# Altium PCB PE2.PcbDoc
Units mm, origin at the board's own origin, x right, y up, seen from the top; angles counter-clockwise.
Board outline 87.72 x 35 mm, 2 copper layers (Top Layer, Bottom Layer); 76 components, 57 nets, 284 pads, 403 vias.
Unrouted connection lines stored in the file: 1.
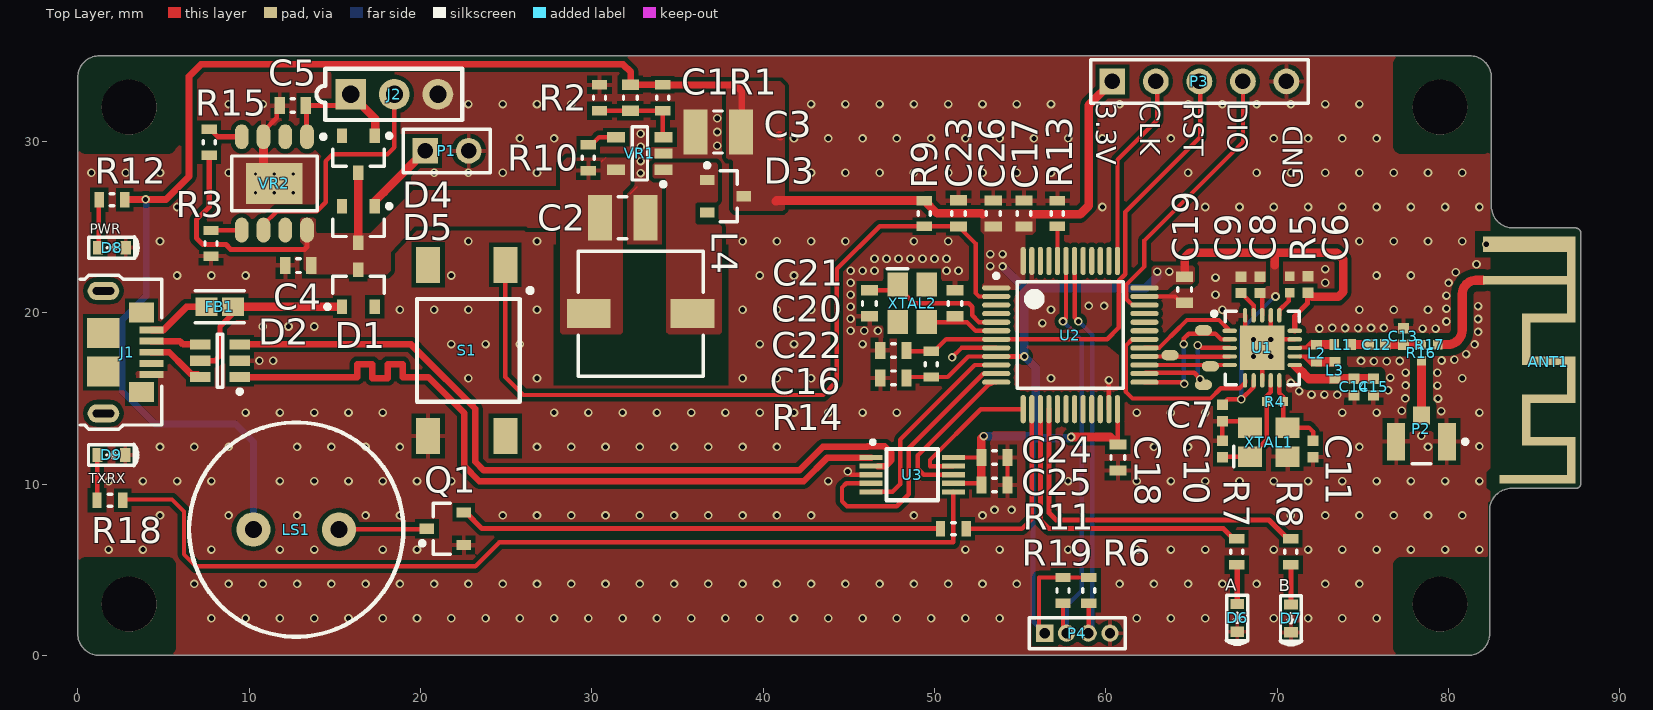
[diagram p0: Top Layer view]
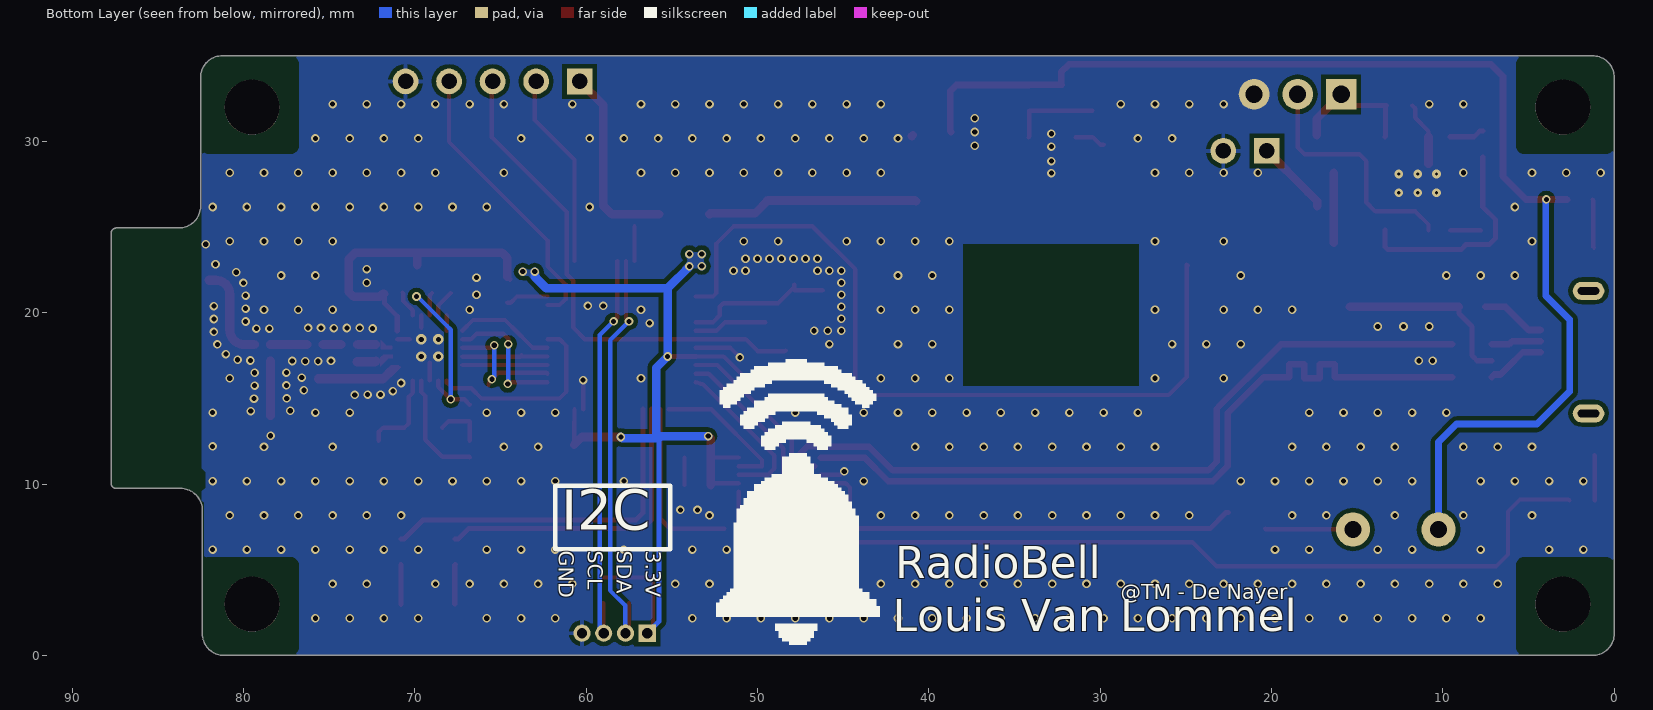
[diagram p1: Bottom Layer view, seen from below]

## Layer stack, top to bottom
Top Solder: solder mask 0.0102, Solder Resist, Dk 3.5
Top Layer: signal copper 0.0356
Dielectric 1: dielectric 0.32, FR-4, Dk 4.8
Bottom Layer: signal copper 0.0356
Bottom Solder: solder mask 0.0102, Solder Resist, Dk 3.5

## Board outline
1.27,0 cw(c1.27,1.27) 0,1.27 0,33.73 cw(c1.27,33.73) 1.27,35 81.23,35 cw(c81.23,33.73) 82.5,33.73 82.5,26.219 ccw(c83.77,26.219) 83.77,24.949 87.412,24.949 cw(c87.412,24.642) 87.719,24.642 87.719,10.039 cw(c87.43,10.039) 87.43,9.75 83.67,9.75 ccw(c83.67,8.48) 82.4,8.48 82.4,1.27 cw(c81.13,1.27) 81.13,0

## Design rules (kind name [scope] priority, off if disabled: settings)
Clearance Clearance_RF [InNetClass('RF') vs InNetClass('RF')] p1: gap=0.254 ignorepadtopadclearanceinfootprint=TRUE except(0: Arc-Hole Track-Hole SMDPad-Hole THPad-Hole Via-Hole Fill-Hole Poly-Hole Region-Hole Text-Hole; 0.1: Arc-SMDPad Track-SMDPad; 0.2: Arc-Arc Arc-Track Track-Track; 0.5: Arc-Fill Arc-Poly Track-Fill Track-Poly SMDPad-Poly)
Clearance [All] p2: gap=0.254 ignorepadtopadclearanceinfootprint=TRUE except(0: Arc-Hole Track-Hole SMDPad-Hole THPad-Hole Via-Hole Fill-Hole Poly-Hole Region-Hole Text-Hole; 0.1: Arc-SMDPad Track-SMDPad; 0.2: Arc-Arc Arc-Track Track-Track)
DiffPairsRouting [All] p1: maxlimit=0.254 minlimit=0.254 mostfreqgap=0.254 toplayer_minwidth=0.381 toplayer_maxwidth=0.381 toplayer_prefwidth=0.381 bottomlayer_minwidth=0.381 bottomlayer_maxwidth=0.381 bottomlayer_prefwidth=0.381 maxuncoupledlength=12.7
PlaneConnect [All] p1: pad.planeconnectstyle=Relief pad.reliefexpansion=0.508 pad.reliefentries=4 pad.reliefconductorwidth=0.254 pad.reliefairgap=0.254 via.planeconnectstyle=Direct via.reliefexpansion=0.508 via.reliefentries=4 via.reliefconductorwidth=0.254 via.reliefairgap=0.254
PolygonConnect [All] p1: thpad.connectstyle=Relief thpad.reliefconductorwidth=0.254 thpad.reliefentries=4 thpad.polygonreliefangle="90 Angle" thpad.airgapwidth=0.254 smdpad.connectstyle=Relief smdpad.reliefconductorwidth=0.254 smdpad.reliefentries=4 smdpad.polygonreliefangle="90 Angle" smdpad.airgapwidth=0.254 via.connectstyle=Direct via.reliefconductorwidth=0.254 via.reliefentries=4 via.polygonreliefangle="90 Angle" via.airgapwidth=0.254
RoutingVias [All] p1: holewidth=0.711 width=1.27 viastyle="Through Hole" minholewidth=0.711 minwidth=1.27 maxholewidth=0.711 maxwidth=1.27
SolderMaskExpansion [All] p1: expansion=0.102 istentingtop=FALSE
Width RF [InNetClass('RF')] p1: maxlimit=0.535 minlimit=0.535 preferedwidth=0.535 impedanceprofiledriven=TRUE impedanceprofileid={F3C3EB3E-1D35-4288-9E20-0115B76D9D70} impedanceprofilevalue=50.000000 minimp=50.000000 maximp=50.000000 favimp=50.000000 // RF Impedance
Width [All] p2: maxlimit=0.535 minlimit=0.254 preferedwidth=0.254 bottomlayer_maxwidth=0.5 minimp=50.000000 maximp=50.000000 favimp=50.000000
28 further rules are at their usual default settings.

## Classes and differential pairs
net class RF: ANT1 ANT2 NetANT1_1 NetC12_1 NetC12_2 NetP2_3 VDD_PA
component class U_RF: ANT1 C6 C7 C8 C9 C10 C11 C12 C13 C14 C15 L1 L2 L3 P2 R4 R5 R16 R17 U1 XTAL1
component class U_POWER: C1 C2 C3 C4 C5 C24 C25 D1 D2 D3 D4 D5 D8 D9 FB1 J1 J2 L4 P1 R1 R2 R3 R10 R12 R15 R18 U3 VR1 VR2
component class U_MCU: C16 C17 C18 C19 C20 C21 C22 C23 C26 D6 D7 LS1 P3 P4 Q1 R6 R7 R8 R9 R11 R13 R14 R19 S1 U2 XTAL2
differential pair USBD: +USBD_P -USBD_N
differential pair USB: +USB_P -USB_N

## Components (designator, comment, footprint, x,y, rotation, side; value= is the part's Value field where it differs from the comment)
ANT1 "PCB Antenna 2.4Ghz 50ohm" "2.4GHZ ANTENNA" 85.82,17.145 r270 top locked
C1 "Cf = 1 / (2 × π X R1 × fz)" CAP_0603 32.25,32.55 r270 top value=4.7nF
C2 "" CAP_1210 31.8,25.55 r0 top value=2.2uF
C3 "" CAP_1210 37.375,30.55 r180 top value=4.7uF
C4 "" CAP_0603 12.875,22.75 r0 top value=1uF
C5 "" CAP_0603 12.55,32.1 r0 top value=1uF
C6 "0402" CAP_0402 71.795,21.645 r270 top value=10nF
C7 "0402" CAP_0402 66.8,14.15 r90 top value=10nF
C8 "0402" CAP_0402 69,21.63 r270 top value=10nF
C9 "0402" CAP_0402 67.9,21.63 r270 top value=33nF
C10 "0402" CAP_0402 66.8,12.05 r270 top value=30pF
C11 "0402" CAP_0402 72.1,12.05 r90 top value=30pF
C12 "0402" CAP_0402 75.82,18.145 r180 top value=1.5pF
C13 "0402" CAP_0402 77.37,18.62 r90 top value=1pF
C14 "0402" CAP_0402 74.495,15.67 r270 top value=2.2nF
C15 "0402" CAP_0402 75.62,15.674 r270 top value=4.7pF
C16 "" CAP_0603 47.6,16.2 r0 top value=4.7uF
C17 "" CAP_0603 55.225,25.798 r270 top value=100nF
C18 "" CAP_0603 60.7,11.55 r90 top value=100nF
C19 "" CAP_0603 64.6,21.35 r90 top value=100nF
C20 "" CAP_0603 46.2,20.55 r90 top value=15pF
C21 "" CAP_0603 51.2,20.55 r270 top value=15pF
C22 "" CAP_0603 47.6,17.8 r0 top value=100nF
C23 "" CAP_0603 51.4,25.8 r270 top value=100nF
C24 "" CAP_0603 53.5,11.55 r0 top value=0.1uF
C25 "" CAP_0603 53.5,9.95 r0 top value=0.1uF
C26 "" CAP_0603 53.425,25.798 r270 top value=100nF
D1 "" SOT-23_L 16.375,21.425 r90 top
D2 "USBLC6-2SC6" STM-SOT23-6L_V 8.3,17.2 r180 top
D3 "" SOT-23_L 37.8,26.8 r0 top
D4 "" SOT-23_L 16.375,29.25 r270 top
D5 "" SOT-23_L 16.375,25.15 r270 top
D6 "LED" LED_0603 67.665,2.181 r270 top
D7 "LED" LED_0603 70.8,2.15 r270 top
D8 "LED" LED_0603 2,23.8 r0 top
D9 "LED" LED_0603 1.975,11.7 r0 top
FB1 "BLM18PG121SN1D" FP-BLM18-0_15-t0_8-IPC_A 8.287,20.35 r0 top
J1 "USB B micro" "USB Micro B" 2.9,17.7 r270 top
J2 "3 pin header" Header_3 15.935,32.75 r270 top
L1 "0402" IND_0402 73.82,18.145 r0 top value=3.9nH
L2 "0402" IND_0402 72.295,17.645 r90 top value=8.2nH
L3 "0402" IND_0402 73.37,16.645 r270 top value=2.7nH
L4 "" INDP7373X45N 32.85,19.95 r0 top value=10uH
LS1 "Buzzer" Buzzer 12.75,7.35 r0 top
P1 "Solar" HDR1X2 20.275,29.45 r0 top
P2 "" HRS-U.FL-R-SMT-3_V 78.421,12.48 r180 top
P3 "Header 5" HDR1X5 60.38,33.5 r0 top
P4 "MHDR1X4" MHDR1X4 56.433,1.3 r0 top
Q1 "NPN" SOT23_L 21.452,7.396 r180 top
R1 "R1 = R2 × (VOUT/1.23 − 1)" RES_0603 34.15,32.55 r270 top value=5k6
R2 "" RES_0603 30.45,32.55 r90 top value=3k3
R3 "" RES_0603 7.775,24.05 r90 top value=33k
R4 "" RES_0402 69.87,14.82 r0 top value=1M
R5 "0402" RES_0402 70.72,21.645 r90 top value=22k
R6 "" RES_0603 59,3.8 r90 top value=2k2
R7 "" RES_0603 67.643,6.055 r90 top value=1k
R8 "" RES_0603 70.798,6.055 r90 top value=1k
R9 "" RES_0603 49.4,25.8 r270 top value=3.3k
R10 "" RES_0603 29.8,29.05 r90 top value=4.7K
R11 "" RES_0603 51.1,7.4 r180 top value=1k
R12 "" RES_0603 2,26.6 r0 top value=1k
R13 "" RES_0603 57.175,25.798 r90 top value=1k
R14 "" RES_0603 49.8,17 r90 top value=1k
R15 "" RES_0603 7.675,29.95 r90 top value=10k
R16 "0402" RES_0402 78.42,17.67 r90 top value=0R
R17 "0402" RES_0402 78.895,18.145 r0 top value=0R
R18 "" RES_0603 1.875,9.05 r0 top value=1k
R19 "" RES_0603 57.5,3.8 r90 top value=2k2
S1 "" TactileSwitch6x6 22.7,17.8 r270 top
U1 "nRF24L01P" "QFN20 4X4" 69.125,17.95 r0 top
U2 "STM32F301C8T6TR" STM-LQFP48_M 57.927,18.7 r0 top
U3 "CH340E" MSOP-10 48.7,10.55 r0 top
VR1 "LM2731YMF" SOT23-5 32.8,29.3 r180 top
VR2 "Battery charger" SOP127P600-8N 11.475,27.55 r270 top
XTAL1 "16Mhz" 16Mhz_Crystal 69.5,12.45 r0 top
XTAL2 "32Mhz" 16Mhz_Crystal 48.7,20.55 r270 top

## Footprints (in the part's own frame and the unit in brackets; to place one, negate y for a bottom-side part, rotate by r counter-clockwise, add the part's x,y. Pads: shape width x height; smd on the part's side, far side on the other; paste and mask are expansions set on the pad)
"2.4GHZ ANTENNA" [mm] "PCB Antenna 2.4Ghz, TI AN043"
  rect 5x0.5 smd mask+0.102: 1(-4.8,1.35)
  rect 0.5x4.9 smd mask+0.102: 1(-4.75,-1.35)
  rect 0.5x2.64 smd mask+0.102: 1(-2.55,-0.22) 1(-0.05,-0.22) 1(2.15,-0.22) 1(4.65,-0.22)
  rect 2x0.5 smd mask+0.102: 1(-1.3,-1.29) 1(3.4,-1.29)
  rect 2.7x0.5 smd mask+0.102: 1(1.05,1.35) 1(5.75,1.35)
  rect 0.5x3.94 smd mask+0.102: 1(6.85,-0.87)
  rect 0.9x4.9 smd mask+0.102: 2(-6.85,-1.35)
16Mhz_Crystal [mm] "16Mhz crystal"
  rect 1.4x1.2 smd: 1(-1.1,-0.85) 3(1.1,0.85) GND(-1.1,0.85) GND(1.1,-0.85)
  silkscreen extent -2.02,-1.45 -2.02,-0.25, body extent -1.6,-1.25 1.6,1.25, height 0.6
Buzzer [mm]
  round 2 hole 1: 1(-2.5,0) 2(2.5,0)
  silkscreen extent -6.25,-6.25 6.25,6.25, body extent -6,-5.99 6,5.99, height 7.5
CAP_0402 [mm] "Chip Capacitor, 2-Leads, Body 1,00x0,50mm, IPC Medium Density"
  rect 0.6x0.64 smd: 1(-0.48,0) 2(0.48,0)
  body extent -0.5,-0.25 0.5,0.25, height 0.35
CAP_0603 [mm] "Chip Capacitor, 2-Leads, Body 1,55x0,85mm, IPC Medium Density"
  rect 0.6x1 smd: 1(-0.76,0) 2(0.76,0)
  silkscreen extent -0.1,-0.4 0.1,0.4, body extent -0.78,-0.43 0.77,0.42, height 0.45
CAP_1210 [mm]
  rect 1.4x2.65 smd: 1(-1.325,0) 2(1.325,0)
  silkscreen extent -0.25,-1.22 0.25,1.23, body extent -1.6,-1.25 1.6,1.25, height 0.55
FP-BLM18-0_15-t0_8-IPC_A [mm]
  rect 1.306x1.058 smd paste+0 mask+0: 1(-0.776,0) 2(0.776,0)
  silkscreen extent -1.43,-0.93 1.43,0.93, body extent -1.93,-1.03 1.93,1.03, height 0.25
HDR1X2 [mm] "Connector; Header; 2 Position"
  rect 1.5x1.5 hole 0.9: 1(0,0)
  round 1.5 hole 0.9: 2(2.54,0)
  silkscreen extent -1.27,-1.27 3.81,1.27
HDR1X5 [mm] "Connector; Header; 5 Position"
  rect 1.5x1.5 hole 0.9: 1(0,0)
  round 1.5 hole 0.9: 2(2.54,0) 3(5.08,0) 4(7.62,0) 5(10.16,0)
  silkscreen extent -1.27,-1.27 11.43,1.27
Header_3 [mm]
  rect 1.8x1.8 hole 1: 1(0,0)
  round 1.8 hole 1: 2(0,2.54) 3(0,5.08)
  silkscreen extent -1.5,-2 1.5,6.5
HRS-U.FL-R-SMT-3_V [mm] "SMT, 3-Leads, Body 2.6x2.6mm"
  rect 1.05x2.2 smd: 1(-1.475,0) 2(1.475,0)
  rect 1x1.05 smd: 3(0,-1.525)
  silkscreen extent -2.68,-0.12 0.55,1.3, body extent -1.3,-1.3 1.3,1.3, height 1.25
IND_0402 [mm] "Chip Inductor, 2-Leads, Body 1,00x0,50mm, IPC Medium Density"
  rect 0.57x0.64 smd: 1(-0.495,0) 2(0.495,0)
  body extent -0.5,-0.25 0.5,0.25, height 0.35
INDP7373X45N [mm] "Precision Wire Wound Inductor, 2-Leads, Body 7,30x7,30mm, IPC Medium Density"
  rect 2.55x1.7 smd: 1(-3.025,0) 2(3.025,0)
  silkscreen extent -3.65,-3.65 3.65,3.65, body extent -3.75,-3.65 3.75,3.65, height 4.6
LED_0603 [mm]
  rect 0.6x0.8 smd: 1(-0.819,0) 2(0.8,0)
  silkscreen extent -1.35,-0.61 1.5,0.61, body extent -0.83,-0.35 0.83,0.37, height 0.68
MHDR1X4 [mm] "Connector; Header; 4 Position"
  rect 1x1 hole 0.6: 1(0,0)
  round 1 hole 0.6: 2(1.27,0) 3(2.54,0) 4(3.81,0)
  silkscreen extent -0.9,-0.9 4.71,0.9
MSOP-10 [mm] "USB to serial"
  rect 1.35x0.3 smd: 1(-2.4,1) 2(-2.4,0.5) 3(-2.4,0) 4(-2.4,-0.5) 5(-2.4,-1) 6(2.4,-1) 7(2.4,-0.5) 8(2.4,0) 9(2.4,0.5) 10(2.4,1)
  silkscreen extent -2.4,-1.5 1.5,2, body extent -2.45,-1.5 2.45,1.5, height 1.15
"QFN20 4X4" [mm] "QFN, 20-Leads, Body 4,00x4,00mm, Pitch 0,50mm, Thermal Pad 2,60x2,60mm, IPC Medium Density"
  oval 0.85x0.25 smd: 1(-1.9,1) 2(-1.9,0.5) 3(-1.9,0) 4(-1.9,-0.5) 5(-1.9,-1) 11(1.9,-1) 12(1.9,-0.5) 13(1.9,0) 14(1.9,0.5) 15(1.9,1)
  oval 0.25x0.85 smd: 6(-1,-1.9) 7(-0.5,-1.9) 8(0,-1.9) 9(0.5,-1.9) 10(1,-1.9) 16(1,1.9) 17(0.5,1.9) 18(0,1.9) 19(-0.5,1.9) 20(-1,1.9)
  rect 2.6x2.6 smd: 21(0,0)
  silkscreen extent -2.92,-2.15 2.15,2.15, body extent -2.02,-2.02 2.02,2.02, height 0.95
RES_0402 [mm] "Chip Resistor, 2-Leads, Body 1,00x0,50mm, IPC Medium Density"
  rect 0.55x0.55 smd: 1(-0.475,0) 2(0.475,0)
  body extent -0.5,-0.25 0.5,0.25, height 0.35
RES_0603 [mm] "Chip Resistor, 2-Leads, Body 1,55x0,85mm, IPC Medium Density"
  rect 0.55x0.9 smd: 1(-0.75,0) 2(0.75,0)
  silkscreen extent -0.1,-0.35 0.1,0.35, body extent -0.78,-0.43 0.77,0.42, height 0.45
SOP127P600-8N [mm]
  oval 1.45x0.8 smd: 1(-2.725,1.905) 2(-2.725,0.635) 3(-2.725,-0.635) 4(-2.725,-1.905) 5(2.725,-1.905) 6(2.725,-0.635) 7(2.725,0.635) 8(2.725,1.905)
  rect 2.4x3.3 smd: 9(0,0)
  silkscreen extent -2.85,-2.5 1.6,2.98, body extent -2,-2.5 2,2.5, height 1.45
SOT23-5 [mm] "SOT23, 5-Leads, Body 3,00x2,85mm, Pitch 0,95mm, IPC Medium Density"
  rect 1.05x0.6 smd: 1(-1.375,0.95) 2(-1.375,0) 3(-1.375,-0.95) 4(1.375,-0.95) 5(1.375,0.95)
  silkscreen extent -1.5,-1.55 0.45,1.92, body extent -1.5,-1.55 1.5,1.55, height 1.3
SOT23_L [mm] "SOT23, 3-Leads, Body 2.9x1.3mm, Pitch 0.95mm, Lead Span 2.3mm - Reverse Pinning, IPC High Density"
  rect 0.85x0.6 smd: 1(1.075,0) 2(-1.075,-0.95) 3(-1.075,0.95)
  silkscreen extent -0.3,-1.5 1.47,1.5, body extent -0.7,-1.5 0.7,1.5, height 1.1
SOT-23_L [mm] "SOT23, 3-Leads, Body 2.9x1.3mm, Pitch 0.95mm, Lead Span 2.5mm, IPC High Density"
  rect 0.85x0.6 smd: 1(-1.075,0.95) 2(-1.075,-0.95) 3(1.075,0)
  silkscreen extent -1.2,-1.5 0.7,1.92, body extent -0.7,-1.5 0.7,1.5, height 1.1
STM-LQFP48_M [mm] "QFP, 48-Leads, Body 7x7mm, Pitch 0.5mm, IPC Low Density"
  oval 1.65x0.3 smd: 1(-4.325,2.75) 2(-4.325,2.25) 3(-4.325,1.75) 4(-4.325,1.25) 5(-4.325,0.75) 6(-4.325,0.25) 7(-4.325,-0.25) 8(-4.325,-0.75) 9(-4.325,-1.25) 10(-4.325,-1.75) 11(-4.325,-2.25) 12(-4.325,-2.75) 25(4.325,-2.75) 26(4.325,-2.25) 27(4.325,-1.75) 28(4.325,-1.25) 29(4.325,-0.75) 30(4.325,-0.25) 31(4.325,0.25) 32(4.325,0.75) 33(4.325,1.25) 34(4.325,1.75) 35(4.325,2.25) 36(4.325,2.75)
  oval 0.3x1.65 smd: 13(-2.75,-4.325) 14(-2.25,-4.325) 15(-1.75,-4.325) 16(-1.25,-4.325) 17(-0.75,-4.325) 18(-0.25,-4.325) 19(0.25,-4.325) 20(0.75,-4.325) 21(1.25,-4.325) 22(1.75,-4.325) 23(2.25,-4.325) 24(2.75,-4.325) 37(2.75,4.325) 38(2.25,4.325) 39(1.75,4.325) 40(1.25,4.325) 41(0.75,4.325) 42(0.25,4.325) 43(-0.25,4.325) 44(-0.75,4.325) 45(-1.25,4.325) 46(-1.75,4.325) 47(-2.25,4.325) 48(-2.75,4.325)
  silkscreen extent -4.45,-3.1 3.1,3.57, body extent -3.5,-3.5 3.5,3.5, height 1.6
STM-SOT23-6L_V [mm] "SOT23, 6-Leads, Body 3.05x1.75mm, Pitch 0.95mm"
  rect 1.2x0.6 smd: 1(-1.15,0.95) 2(-1.15,0) 3(-1.15,-0.95) 4(1.15,-0.95) 5(1.15,0) 6(1.15,0.95)
  silkscreen extent -1.28,-1.55 0.15,1.92, body extent -1.6,-1.53 1.6,1.53, height 1.45
TactileSwitch6x6 [mm]
  rect 2.1x1.4 smd: 1(-5,2.25) 2(5,2.25) 3(-5,-2.25) 4(5,-2.25)
  silkscreen extent -3.64,-2.9 3,3.84, body extent -5,-3 5,3, height 5.07
"USB Micro B" [mm] "USB3076"
  rect 0.4x1.4 smd: 1(-1.3,1.4) 2(-0.65,1.4) 3(0,1.4) 4(0.65,1.4) 5(1.3,1.4)
  rect 1.15x1.45 smd: 6(-2.32,0.83) 7(2.32,0.83)
  oval 1.05x1.85 hole 1.25 slot 0.45 at 0 deg: 8(-3.575,-1.4) 11(3.575,-1.4)
  rect 1.75x1.9 smd: 9(-1.125,-1.4) 10(1.125,-1.4)
  silkscreen extent -4.5,-2.75 4.5,2, body extent -4.05,-4.1 4.05,1.7, height 2.73

## Part data
ANT1: library part "Antenna 2.4Ghz"
C1 C2 C3 C4 C5 C6 C7 C8 C9 C10 C11 C12 C13 C14 C15 C16 C17 C18 C19 C20 C21 C22 C23 C24 C25 C26: library part Cap, "Capacitor", LatestRevisionDate=17-Jul-2002, LatestRevisionNote="Re-released for DXP Platform.", PackageDescription="Radial Cap, Thru-Hole; 2 Leads; 0.3 in Pin Spacing", PackageReference=RAD-0.3, Published=8-Jun-2000, Publisher="Altium Limited"
D1 D3 D4 D5: library part "Diode BAT17", "Silicon RF Schottky Diode for Mixer Applications in the VHF/UHF Range", ComponentLink1Description="Manufacturer Link", ComponentLink1URL=http://www.infineon.com/, ComponentLink2Description=Datasheet, ComponentLink2URL=http://www.infineon.com/upload/Document/cmc_upload/documents/009/363/bat17series.pdf, DatasheetVersion=Oct-1999, LatestRevisionDate=29-May-2009, LatestRevisionNote="IPC-7351 Footprint Added.", Note="Pin 2 is not connected and not drawn.", PackageDescription="3-Pin SOT-23 Package 0.95 mm Pitch, 2.5 mm Lead Span", PackageReference=SOT-23, PackageVersion=Sep-2001, Published=21-Mar-2003, Publisher="Altium Limited"
D2: library part CMP-2000-05378-1, "Very low capacitance ESD protection, 3.5 pF, -40 to 125 degC, 6-Pin SOT23, RoHS, Tape and Reel", Capacitance Value=3.5pF, Clamping Voltage=17V, Leakage Current=0.15uA, Manufacturer=STMicroelectronics, Operating Temp Range=-40Cto125C, Operating Temperature Classification=Automotive, Operating Temperature Max Deg. C=125C, Operating Temperature Min Deg. C=-40C, Package / Case=SOT-23, Package Description="6-Pin Small Outline Transistor, Body 2.925 x 1.625 mm, Pitch 0.95 mm", Package Reference=SOT23-6L, Peak Pulse Current=5A, Reverse Breakdown Voltage=6V, Reverse Stand-off Voltage=5V, Test Current (It)=1mA, Clamping Voltage (Max)=17V, Configuration=Dual, Datasheet URL=http://www.st.com/st-web-ui/static/active/en/resource/technical/document/datasheet/CD00050750.pdf, Datasheet Version="Rev. 5, 10/2011", Direction Type=Uni-Directional, Leakage Current (Max)=0.15uA, Manufacturer URL=http://www.st.com/, Mounting=SurfaceMount, Mounting Style=SurfaceMount, Number of Elements=1, Packaging=TapeandReel, Pin Count=6, Polarity=Uni-Directional, Product Depth (mm)=1.75mm, Product Height (mm)=1.3mm, Product Length (mm)=3.05mm, Rad Hardened=No, Suppressor Type=DiodeArrays, Working Voltage=5V, Working Voltage (Max)=5V
D6 D7 D8 D9: library part LED2, "Typical RED, GREEN, YELLOW, AMBER GaAs LED", LatestRevisionDate=17-Jul-2002, LatestRevisionNote="Re-released for DXP Platform.", PackageDescription="SM LED; 2 Flat Leads", PackageReference=3.2X1.6X1.1, PackageVersion=Feb-2002, Published=8-Jun-2000, Publisher="Altium Limited"
FB1: library part CMP-0686-00557-7, "Chip Ferrite Bead, 0603, 120Ω @ 100MHz, 0.05Ω, 25%, 2A", Case Code (Imperial)=0603, Case Code (Metric)=1608, Current Rating=2A, DC Resistance (DCR)=50mR, Frequency=100MHz, Max Operating Temperature=125°C, Min Operating Temperature=-55°C, Package Quantity=1, Tolerance=25%, Case/Package=0603, Core Material=Ferrite, DC Current=2A, Depth=0.8mm, Height=0.8mm, Impedance=120R, Lead Free="Lead Free", Length=1.6mm, Material=Steel, Max Current Rating=2A, Max DC Current=2A, Number of Circuits=1, Number of Lines=1, Number of Pins=2, Packaging="Tape and Reel", Radiation Hardening=No, REACH SVHC="No SVHC", RoHS Compliant=Yes, Shielding=Unshielded, Termination=SMD/SMT, Test Frequency=100MHz, Width=0.8mm
J1: library part "USB micro B"
J2: library part Header_3
L1 L2 L3 L4: library part Inductor, "Inductor", Code_IEC=1005, Code_JEITA=0402, LatestRevisionDate=29-May-2009, LatestRevisionNote="IPC-7351 Footprint Added.", PackageDescription="Chip Inductor", PackageReference=0402-A, Published=8-Jun-2000, Publisher="Altium Limited"
LS1: "Magnetic Transducer Buzzer", ComponentLink1Description="Manufacturer Link", ComponentLink1URL=http://www.megastar.com/linecard/buzzmode/index.php, DatasheetVersion=17-Dec-2003, LatestRevisionDate=17-Dec-2003, LatestRevisionNote="Schematic revised, PCB Footprint replaced.", PackageDescription="Magnetic Transducer Buzzer", PackageReference=ABSM-1574, Published=24-Mar-1999, Publisher="Altium Limited"
P1: library part "Header 2H", "Header, 2-Pin, Right Angle", LatestRevisionDate=17-Jul-2002, LatestRevisionNote="Re-released for DXP Platform.", Publisher="Altium Limited"
P2: library part CMP-2000-05153-1, "Ultra Small Coaxial Connector, 6 GHz, -40 to 90 degC, 3-Pin SMD, RoHS, Bulk", Dielectric Material=LiquidCrystalPolymer(LCP), Frequency - Max=6GHz, Housing Color=Silver, Manufacturer="Hirose Electric", Operating Temperature=-40degC~90degC, Package Description="3-Pin Surface Mount Device, Body 2.6 x 2.6 mm", Package Reference=U.FL-R-SMT, Standard Package=100, Body Finish=Silver, Body Material=PhosphorBronze, Category=Connectors,Interconnects, Center Contact Material=PhosphorBronze, Center Contact Plating=Gold, Connector Style=U.FL, Connector Type=Jack,MalePin, Contact Termination=Solder, Datasheet URL=https://datasheet.ciiva.com/26945/getdatasheetpartid-475239-26945414.pdf, Datasheet Version=Feb-09, Dynamic Catalog=U.FLSeries, Family=CoaxialConnectors(RF), Fastening Type=Snap-On, Featured Product=HiroseU.FLSeries, Impedance=50Ohm, Manufacturer URL=https://www.hirose.com, Minimum Quantity=UltraMiniatureCoaxial, Mounting Type=SurfaceMount, Online Catalog=U.FLSeries, Other Names="H122041 / U.FL-R-SMT-1(01)-ND", Packaging=Bulk, Quantity Available=Bulk, Series=U.FL, Shield Termination=Solder, Unit PriceUSD=U.FL
P3: "Header, 5-Pin", LatestRevisionDate=17-Jul-2002, LatestRevisionNote="Re-released for DXP Platform.", Publisher="Altium Limited"
P4: "Header, 4-Pin", LatestRevisionDate=17-Jul-2002, LatestRevisionNote="Re-released for DXP Platform.", Publisher="Altium Limited"
Q1: "NPN Bipolar Transistor", Code_JEDEC=TO-226-AA, LatestRevisionDate=17-Jul-2002, LatestRevisionNote="Re-released for DXP Platform.", PackageDescription="TO, Flat Index; 3 In-Line, Axial Leads; Body Dia. 4.8mm; Leads 0.55 x 0.51 mm (max)", PackageReference=TO-226-AA, Published=8-Jun-2000, Publisher="Altium Limited"
R1 R2 R4 R5 R6 R7 R8 R9 R10 R11 R12 R13 R14 R15 R16 R17 R18 R19: library part Res2, "Resistor", LatestRevisionDate=17-Jul-2002, LatestRevisionNote="Re-released for DXP Platform.", PackageDescription="Axial Device, Thru-Hole; 2 Leads; 0.4 in Pin Spacing", PackageReference=AXIAL-0.4, Published=8-Jun-2000, Publisher="Altium Limited"
R3: library part Res2, "Determines charging speed => p14. Datasheet                                 40kohm => 200mA max, solar only has 100mA", LatestRevisionDate=17-Jul-2002, LatestRevisionNote="Re-released for DXP Platform.", PackageDescription="Axial Device, Thru-Hole; 2 Leads; 0.4 in Pin Spacing", PackageReference=AXIAL-0.4, Published=8-Jun-2000, Publisher="Altium Limited"
S1: library part "Tactile Switch", "gekruisde schakelaar (1.4 en 2.3)"
U1: "Single Chip Transceiver, 2.4 GHz, 60 mW, 1.9 to 3.6 V, -40 to 85 degC, 20-Pin QFN, RoHS, Tray"
U2: library part CMP-0537-00001-2, "ARM Cortex-M4 32-bit MCU, 64 KB Flash, 16 KB Internal RAM, 37 I/Os, 48-Pin LQFP, -40 to 85 degC, Tape and Reel", I/Os (High Current)=37, Operating Frequency(F) (Processor speed) (MHz)=72, Package Description="48-Pin Low Profile Quad Flat Package, Body 7 x 7 mm, Pitch 0.5 mm", Package Reference=LQFP48, Supply Voltage(Vcc) min (V)=2, ComponentLink1Description="Manufacturer URL", ComponentLink1URL=http://www.st.com/, ComponentLink2Description=Datasheet, ComponentLink2URL=http://www.st.com/st-web-ui/static/active/en/resource/technical/document/datasheet/DM00093332.pdf, Core="ARM Cortex-M4", D/A Converter=1, DatasheetVersion="Rev. 6", FLASH Size (Prog) (kB)=64, Internal RAM Size (kB)=16, Mounting Technology="Surface Mount", Packing="Tape and Reel"
U3: "USB to Serial Uart"
VR1: library part LM2731, "DC-DC Switching Boost (Step Up) Regulator, Adjustable, 2.7V-14Vin, 1.23V-22Vout, 2Aout, SOT-23-5"
VR2: library part XC6804A3E1QR-G
XTAL1 XTAL2: library part Crystal, "Crystal, 16 MHz, SMD, 3.2mm x 2.5mm, 30 ppm, 18 pF, 30 ppm, 7M"

## Free pads (board coordinates)
  round 3.2 hole 3.2 unplated mask+1: MH(3,3) MH(3,32) MH(79.5,3) MH(79.5,32)
  oval 1x0.6 smd paste+0 mask+0: NetU1_12(63.75,17.525) NetU1_12(65.7,15.8) NetU1_12(65.7,18.975) NetU1_12(66.1,16.875)

## Via types
v1: diameter 0.5, hole 0.3, Top Layer to Bottom Layer, tented both sides, 393 vias
v2: diameter 0.5, hole 0.2, Top Layer to Bottom Layer, 6 vias
v3: diameter 0.6, hole 0.3, Top Layer to Bottom Layer, tented both sides, 4 vias

## Nets (pads, with @x,y where several pads share a name; then routed paths per layer and width w, separated by ;. In a path a pad name is that pad's centre, name@x,y a point inside that pad or via, vN(x,y) a via of type N, cw(c..) or ccw(c..) an arc to the next point about the centre after c; other vN are vias at no path point)
3.3V: C1.1 C3.1 C6.2 C7.2 C8.2 C16.2 C17.2 C18.2 C19.2 C24.1 C25.1 C26.2 D3.3 LS1.1 P3.1 P4.1 R1.1 R6.2 R9.1 R12.2 R14.1 R19.2 U1.7 U1.15 U1.18 U2.1 U2.9 U2.24 U2.36 U2.48 U3.7 U3.10 | length 185.4
  Top Layer w0.254: C16.2 48.41,16.25 R14.1 50.771,16.25 51.972,17.45 U2.9 ; U3.7 C25.1@52.74,10.05 ; U3.10 C24.1 ; P4.1 56.1,1.633 56.1,4.55 R19.2 R6.2 ; U2.24 60.677,13.688 60.7,13.665 C18.2 ; C7.2 67.12,14.95 v1(67.9,14.95) 68.625,15.675 U1.7 ; C8.2 69.125,21.025 U1.18
  Top Layer w0.3: U2.9 v1(55.25,17.45) ; C19.2@64.45,21.96 C19.2 ; U1.15 71.025,19.8 71.775,20.55 C6.2@71.775,20.925
  Top Layer w0.4: R12.2 2.769,26.619 v1(3.963,26.619) 5.156,26.619 6.5,27.962 6.5,33.8 7.202,34.502 31.823,34.502 32.275,34.05 32.275,33.335 C1.1 32.255,33.305 34.145,33.305 R1.1 38.4,33.3 38.75,32.95 38.75,30.6 C3.1
  Top Layer w0.5: 40.75,26.5 40.8,26.55 ; 40.95,30.35 41,30.3 ; R9.1 50.15,25.8 52.75,25.8 52.8,25.75 ; C25.1 52.74,10.05 C24.1 52.74,12.665 v1(52.875,12.8) ; 55.75,25.75 58.5,25.75 59,26.25 59,32.12 P3.1 ; v1(57.969,12.75) 60.26,12.75 C18.2 ; C19.2 64.6,23.207 64.893,23.5 69.85,23.5 ; 69.85,22.775 69.85,23.5 ; C6.2@71.775,21.115 71.865,21.115 72.055,20.925 73.557,20.925 73.85,21.218 73.85,23.125 73.475,23.5 69.85,23.5
  Top Layer w0.535: 40.8,26.55 R9.1
  Bottom Layer w0.254: v1(67.9,14.95) 67.9,19.013 68.143,19.256 69.837,20.95 v1(69.9,20.95)
  Bottom Layer w0.3: 55.741,12.675 55.741,1.992 P4.1
  Bottom Layer w0.4: v1(3.963,26.619) 4,26.581 4,21 2.6,19.6 2.6,15.4 4.5,13.5 9.2,13.5 10.25,12.45 LS1.1
  Bottom Layer w0.5: v1(52.875,12.8) 55.616,12.8 55.741,12.675 57.894,12.675 v1(57.969,12.75) ; v1(53.977,22.708) 55.25,21.435 ; 55.741,12.834 55.9,12.993 55.9,16.8 v1(55.25,17.45) 55.25,21.435 ; v1(63,22.4) 63,22.104 62.331,21.435 55.25,21.435
  other v1: 63.7,22.4 53.25,22.725 53.25,23.425 53.975,23.425
5V: C2.1 C4.2 D1.3 D4.3 D5.3 L4.1 R10.1 R15.1 VR1.5 VR2.8 | length 16.9
  Top Layer w0.3: R15.1@7.675,29.1 7.675,26.181 6.921,25.427 6.921,24.358 7.3,23.979 8.646,23.979 8.929,23.696 13.221,23.696 13.375,23.85 13.375,24.82 VR2.8
  Top Layer w0.5: D5.3 D4.3
ANT1: L2.1 L3.1 U1.12 | length 1.1
  Top Layer w0.535: L2.1@72.277,17.168 L2.1 72.305,17.14 L3.1
ANT2: L1.1 L2.2 U1.13 | length 0.9
  Top Layer w0.535: L2.2 L2.2@72.298,18.142 ; L2.2@72.407,18.145 L1.1 L1.1@73.323,18.142
BEL: C23.2 R9.2 S1.1 U2.2 | length 47
  Top Layer w0.254: S1.1@24.9,22.75 S1.1 24.95,16.25 26,15.2 43.5,15.2 44.3,16 44.3,22.55 46.8,25.05 R9.2 51.39,25.05 C23.2 52.4,24.04 52.4,21.15 52.6,20.95 U2.2
BUZZ: R11.1 U2.14 | length 10.4
  Top Layer w0.254: R11.1@51.95,7.4 55.1,7.4 55.677,7.977 U2.14
GND: ANT1.2 C2.2 C3.2 C4.1 C5.1 C6.1 C7.1 C8.1 C9.1 C10.1 C11.1 C13.2 C14.2 C15.2 C16.1 C17.1 C18.1 C19.1 C20.1 C21.1 C22.1 C23.1 C24.2 C25.2 C26.1 D2.2 D6.2 D7.2 D8.2 D9.2 J1.5 J2.3 P1.2 P2.1 P2.2 P3.5 P4.4 Q1.3 R2.2 R3.1 R5.2 R13.2 S1.4 U1.8 U1.14 U1.17 U1.20 U1.21 U2.8 U2.23 U2.35 U2.47 U3.3 VR1.2 VR2.3 VR2.9 XTAL1.GND | length 20.1
  Top Layer w0.254: VR2.3 10.84,30.6 11.617,31.377 11.617,31.927 C5.1 ; v1(44.94,10.746) 45.136,10.55 U3.3 ; v1(51.029,17.4) 51.579,17.95 U2.8 ; C25.2 C24.2 ; v1@60.175,16.075 60.177,16.073 U2.23 ; U2.35 64.04,20.95 64.4,20.59 C19.1 ; C10.1 C7.1 68.03,13.67 XTAL1.GND@68.4,13.3 ; U1.20 68.125,18.95 U1.21@68.129,18.946 ; U1.8 U1.21@69.125,17.091 ; U1.21@69.625,19.129 U1.17 ; U1.21@70.304,18.45 U1.14
  Top Layer w0.5: VR2.9@10.84,28.694 VR2.3
  other v1: 7.8,2.175 9.8,2.175 11.8,2.175 13.8,2.175 15.8,2.175 17.8,2.175 19.8,2.175 21.8,2.175 23.8,2.175 25.8,2.175 27.8,2.175 29.8,2.175 31.8,2.175 33.8,2.175 35.8,2.175 37.8,2.175 39.8,2.175 41.8,2.175 43.8,2.175 45.8,2.175 47.8,2.175 49.8,2.175 51.8,2.175 53.8,2.175 61.8,2.175 63.8,2.175 65.8,2.175 69.8,2.175 71.8,2.175 73.8,2.175 75.8,2.175 6.8,4.175 8.8,4.175 10.8,4.175 12.8,4.175 14.8,4.175 16.8,4.175 18.8,4.175 20.8,4.175 22.8,4.175 24.8,4.175 26.8,4.175 28.8,4.175 30.8,4.175 32.8,4.175 34.8,4.175 36.8,4.175 38.8,4.175 40.8,4.175 42.8,4.175 44.8,4.175 46.8,4.175 48.8,4.175 50.8,4.175 52.8,4.175 54.8,4.175 60.8,4.175 62.8,4.175 64.8,4.175 66.8,4.175 68.8,4.175 72.8,4.175 74.8,4.175 1.8,6.175 3.8,6.175 7.8,6.175 11.8,6.175 13.8,6.175 17.8,6.175 19.8,6.175 51.8,6.175 53.8,6.175 57.8,6.175 61.8,6.175 63.8,6.175 65.8,6.175 69.8,6.175 71.8,6.175 73.8,6.175 75.8,6.175 77.8,6.175 79.8,6.175 81.8,6.175 4.8,8.175 8.8,8.175 12.8,8.175 16.8,8.175 18.8,8.175 24.8,8.175 26.8,8.175 28.8,8.175 30.8,8.175 32.8,8.175 34.8,8.175 36.8,8.175 38.8,8.175 40.8,8.175 42.8,8.175 48.8,8.175 52.8,8.175 70.8,8.175 72.8,8.175 74.8,8.175 76.8,8.175 78.8,8.175 80.8,8.175 53.5,8.5 54.5,8.5 1.8,10.175 3.8,10.175 5.8,10.175 7.8,10.175 11.8,10.175 13.8,10.175 15.8,10.175 17.8,10.175 19.8,10.175 21.8,10.175 43.8,10.175 57.8,10.175 61.8,10.175 63.8,10.175 65.8,10.175 67.8,10.175 69.8,10.175 71.8,10.175 73.8,10.175 75.8,10.175 77.8,10.175 79.8,10.175 81.8,10.175 4.8,12.175 6.8,12.175 8.8,12.175 12.8,12.175 14.8,12.175 16.8,12.175 18.8,12.175 26.8,12.175 28.8,12.175 30.8,12.175 32.8,12.175 34.8,12.175 36.8,12.175 38.8,12.175 40.8,12.175 62.8,12.175 64.8,12.175 74.8,12.175 78.8,12.175 81.8,12.2 78.413,12.825 9.8,14.175 11.8,14.175 13.8,14.175 15.8,14.175 17.8,14.175 27.8,14.175 29.8,14.175 31.8,14.175 33.8,14.175 35.8,14.175 37.8,14.175 39.8,14.175 41.8,14.175 43.8,14.175 45.8,14.175 47.8,14.175 61.8,14.175 63.8,14.175 65.8,14.175 73.8,14.175 75.8,14.175 81.8,14.175 77.265,14.279 79.576,14.264 79.385,14.994 77.471,15.005 72,15.222 72.754,15.222 73.508,15.209 71.275,15.428 76.47,15.477 77.493,15.758 79.349,15.747 70.8,15.9 60.173,16.071 22.8,16.175 26.8,16.175 38.8,16.175 40.8,16.175 42.8,16.175 56.8,16.175 80.8,16.175 76.596,16.22 77.493,16.512 79.349,16.501 75.643,17.17 76.397,17.169 10.6,17.2 11.4,17.2 74.889,17.189 77.151,17.184 79.593,17.214 80.345,17.262 81.025,17.588 81.517,18.159 21.8,18.175 23.8,18.175 25.8,18.175 39.8,18.175 41.8,18.175 45.8,18.175 81.723,18.884 45.1,18.95 45.9,18.95 46.7,18.95 72.458,19.081 78.488,19.076 79.242,19.076 73.965,19.112 74.719,19.105 73.211,19.121 75.473,19.121 76.227,19.121 10.8,19.2 12.3,19.2 13.8,19.2 56.3,19.4 79.872,19.49 81.728,19.638 45.1,19.65 18.8,20.175 20.8,20.175 22.8,20.175 26.8,20.175 38.8,20.175 40.8,20.175 42.8,20.175 56.8,20.175 66.8,20.175 74.8,20.175 76.8,20.175 78.8,20.175 79.872,20.244 45.1,20.35 59,20.4 59.9,20.4 81.728,20.392 79.872,20.998 45.1,21.05 66.4,21.05 45.1,21.75 72.8,21.75 80.001,21.741 66.4,22.05 5.8,22.175 7.8,22.175 9.8,22.175 21.8,22.175 39.8,22.175 41.8,22.175 75.8,22.175 77.8,22.175 80.424,22.365 45.1,22.45 45.8,22.45 46.5,22.45 50.7,22.45 51.4,22.45 72.8,22.55 81.63,22.828 46.5,23.15 47.2,23.15 47.9,23.15 48.6,23.15 49.3,23.15 50,23.15 50.7,23.15 82.2,24 4.8,24.175 22.8,24.175 26.8,24.175 38.8,24.175 40.8,24.175 42.8,24.175 44.8,24.175 48.8,24.175 50.8,24.175 74.8,24.175 76.8,24.175 78.8,24.175 80.8,24.175 5.8,26.175 59.8,26.175 65.8,26.175 67.8,26.175 69.8,26.175 71.8,26.175 73.8,26.175 75.8,26.175 77.8,26.175 79.8,26.175 81.8,26.175 32.85,28.15 0.8,28.175 2.8,28.175 4.8,28.175 8.8,28.175 20.8,28.175 22.8,28.175 24.8,28.175 26.8,28.175 42.8,28.175 44.8,28.175 46.8,28.175 48.8,28.175 50.8,28.175 52.8,28.175 54.8,28.175 56.8,28.175 64.8,28.175 68.8,28.175 70.8,28.175 72.8,28.175 74.8,28.175 76.8,28.175 78.8,28.175 80.8,28.175 32.85,28.85 32.85,29.7 37.325,29.75 25.8,30.175 27.8,30.175 41.8,30.175 43.8,30.175 45.8,30.175 47.8,30.175 49.8,30.175 51.8,30.175 53.8,30.175 55.8,30.175 57.8,30.175 59.8,30.175 63.8,30.175 69.8,30.175 71.8,30.175 73.8,30.175 75.8,30.175 32.85,30.45 37.325,30.55 37.325,31.35 8.8,32.175 10.8,32.175 22.8,32.175 24.8,32.175 26.8,32.175 28.8,32.175 42.8,32.175 44.8,32.175 46.8,32.175 48.8,32.175 50.8,32.175 52.8,32.175 54.8,32.175 56.8,32.175 60.8,32.175 64.8,32.175 66.8,32.175 68.8,32.175 70.8,32.175 72.8,32.175 74.8,32.175
  other v2: 10.375,27 11.475,27 12.575,27 10.375,28.1 11.475,28.1 12.575,28.1
  other v3: 68.625,17.45 69.625,17.45 68.625,18.45 69.625,18.45
I2C1_SCL: P4.3 R6.1 U2.42 | length 24
  Top Layer w0.254: U2.42 58.177,19.723 v1(58.4,19.5) ; P4.3 59,1.327 R6.1
  Bottom Layer w0.254: v1(58.4,19.5) 59.2,18.7 59.2,1.527 P4.3
I2C1_SDA: P4.2 R19.1 U2.43 | length 24.5
  Top Layer w0.254: R19.1 57.5,1.503 P4.2 ; v1(57.5,19.5) 57.677,19.677 U2.43
  Bottom Layer w0.254: v1(57.5,19.5) 58.6,18.4 58.6,3.8 57.727,2.927 57.727,1.324 P4.2
LED1: R7.2 U2.15 | length 18.4
  Top Layer w0.3: U2.15 56.177,7.923 56.7,7.4 66.873,7.4 67.468,6.805 R7.2
LED2: R8.2 U2.16 | length 20.8
  Top Layer w0.3: U2.16 56.677,8.323 57.1,7.9 69.528,7.9 70.623,6.805 R8.2
NetANT1_1: ANT1.1 R17.2 | length 5.7
  Top Layer w0.535: R17.2 79.945,18.145 ccw(c79.945,19) 80.8,19 80.8,21.1 cw(c81.6,21.1) 81.6,21.9 82,21.9
NetC1_2: C1.2 R1.2 R2.1 VR1.3 | length 5.3
  Top Layer w0.254: R2.1 30.455,31.795 34.145,31.795 R1.2 34.15,30.275 VR1.3
NetC5_2: C5.2 D4.1 J2.1 VR2.1 | length 7.8
  Top Layer w0.3: VR2.1 13.345,30.31 13.345,32.065 C5.2 15.285,32.1 J2.1 ; D4.1 D4.1@17.35,30.35
  Top Layer w0.5: J2.1 17.35,31.335 D4.1@17.35,30.35
NetC9_2: C9.2 U1.19 | length 1.6
  Top Layer w0.254: C9.2@67.92,21.15 C9.2 68.625,20.425 U1.19
NetC10_2: C10.2 R4.1 U1.9 XTAL1.1 | length 6.6
  Top Layer w0.254: C10.2 66.83,11.6 XTAL1.1 69.395,12.595 R4.1 69.395,15.145 69.625,15.375 U1.9
NetC11_2: C11.2 R4.2 U1.10 XTAL1.3 | length 5.1
  Top Layer w0.254: U1.10 70.125,15.325 70.345,15.105 R4.2 70.345,13.555 XTAL1.3 71.85,13.3 72.1,13.05 C11.2
NetC12_1: C12.1 C13.1 R16.2 R17.1 | length 2.1
  Top Layer w0.535: C12.1 76.305,18.14 C13.1 78.415,18.14 R17.1
NetC12_2: C12.2 L1.2 | length 1
  Top Layer w0.535: L1.2 C12.2
NetD1_1: D1.1 D2.5 FB1.2 | length 10.8
  Top Layer w0.3: D2.5 8,17.2 8.3,17.5 8.3,19.2 9.063,19.963 FB1.2
  Top Layer w0.5: FB1.2 D1.1
NetD3_1: D3.1 L4.2 VR1.1
NetD5_1: D5.1 P1.1 | length 4.4
  Top Layer w0.5: D5.1 17.325,26.5 17.875,27.05 P1.1
NetD6_1: D6.1 R7.1 | length 2.3
  Top Layer w0.3: R7.1 67.665,5.283 D6.1
NetD7_1: D7.1 R8.1 | length 2.3
  Top Layer w0.3: R8.1 70.8,5.303 D7.1
NetD8_1: D8.1 R12.1 | length 2.8
  Top Layer w0.254: D8.1 1.216,23.834 1.216,26.565 R12.1
NetD9_1: D9.1 R18.1 | length 2.7
  Top Layer w0.254: R18.1 1.141,9.065 1.141,11.684 D9.1
NetFB1_1: FB1.1 J1.1 | length 3.8
  Top Layer w0.4: J1.1 5,19 6.35,20.35 FB1.1
NetJ2_2: J2.2 VR2.6 | length 14.3
  Top Layer w0.254: VR2.6 10.84,25.15 11.621,25.931 13.956,25.931 14.475,26.45 14.475,28.85 14.875,29.25 18.075,29.25 18.475,29.65 J2.2
NetLS1_2: LS1.2 Q1.1 | length 5.1
  Top Layer w0.254: LS1.2 15.273,7.373 20.354,7.373 Q1.1
NetP2_3: P2.3 R16.1 | length 3.2
  Top Layer w0.535: P2.3 R16.1@78.421,17.194
NetQ1_2: Q1.2 R11.2 | length 28.3
  Top Layer w0.3: Q1.2 22.652,8.346 23.598,7.4 R11.2@50.45,7.4
NetR3_2: R3.2 VR2.5 | length 1.8
  Top Layer w0.254: R3.2 7.788,24.812 9.558,24.812 VR2.5
NetR5_1: R5.1 U1.16 | length 1.6
  Top Layer w0.254: U1.16 70.125,20.146 70.67,20.691 70.67,21.12 R5.1
NetR10_2: R10.2 VR1.4 | length 1.8
  Top Layer w0.254: R10.2 29.975,29.8 30.425,30.25 VR1.4
NetR13_1: R13.1 U2.44 | length 2
  Top Layer w0.254: R13.1 57.177,25.046 U2.44
NetR15_2: R15.2 VR2.4 | length 2
  Top Layer w0.3: R15.2@7.675,30.6 7.85,30.6 8.175,30.275 VR2.4
NetR18_2: R18.2 U3.6 | length 55.1
  Top Layer w0.254: R18.2 2.675,9.1 5.5,9.1 6.2,8.4 6.2,5.9 6.9,5.2 23.2,5.2 24.6,6.6 51.1,6.6 U3.6
NetU1_1: U1.1 U2.29 | length 5.9
  Top Layer w0.254: U2.29 63.108,17.95 63.569,18.411 63.939,18.781 64.733,19.575 66.6,19.575 U1.1
NetU1_2: pad.NetU1_12@65.7,18.975 U1.2 U2.25 | length 7.7
  Top Layer w0.254: U2.25 64.375,15.95 v1@64.525,15.8 ; v1(64.55,18.175) 64.55,18.496 64.833,18.779 64.831,18.781 66.394,18.781 66.725,18.45 U1.2
  Bottom Layer w0.254: v1@64.55,16.075 v1(64.55,18.175)
  other v1: 64.575,15.85
NetU1_3: pad.NetU1_12@65.7,15.8 U1.3 U2.26 | length 7.8
  Top Layer w0.254: U2.26 62.297,16.496 65.154,16.496 65.498,16.152 v1(65.498,16.122) 65.528,16.122 65.6,16.05 pad.NetU1_12@65.7,15.8 ; v1(65.363,18.106) 65.446,18.106 65.602,17.95 U1.3
  Bottom Layer w0.254: v1(65.363,18.106) 65.363,16.257 v1(65.498,16.122)
NetU1_4: pad.NetU1_12@63.75,17.525 U1.4 U2.28 | length 5.3
  Top Layer w0.254: U2.28 pad.NetU1_12@64.033,17.45 ; pad.NetU1_12@63.75,17.525 63.833,17.442 67.217,17.442 U1.4
NetU1_5: pad.NetU1_12@66.1,16.875 U1.5 U2.27 | length 5
  Top Layer w0.254: U2.27 U1.5
NetU1_6: U1.6 U2.30 | length 11.6
  Top Layer w0.254: U2.30 61.544,18.45 61.154,18.06 61.154,15.4 61.554,15 66.1,15 66.7,15.6 67.8,15.6 68.125,15.925 U1.6
NetU2_10: U2.10 U3.5 | length 11.9
  Top Layer w0.254: U3.5 47.55,9.55 48,10 48,12.6 52.35,16.95 U2.10
NetU2_11: U2.11 U3.4 | length 16.5
  Top Layer w0.254: U3.4 44.85,10.05 44.6,9.8 44.6,9 44.896,8.704 47.796,8.704 48.5,9.408 48.5,12.1 52.842,16.442 53.593,16.442 U2.11
NetU2_12: U2.12 U3.8 | length 9.3
  Top Layer w0.254: U3.8 49.375,10.55 49.03,10.895 49.03,11.68 53.15,15.8 U2.12
NetU2_13: U2.13 U3.9 | length 8.4
  Top Layer w0.254: U3.9 49.734,11.05 49.734,11.409 52.7,14.375 U2.13
"OSC IN": C20.2 U2.5 XTAL2.1 | length 8.7
  Top Layer w0.254: C20.2 XTAL2.1@47.84,21.31 ; XTAL2.1 47.85,21.5 48.8,20.55 52,20.55 52.2,20.35 52.2,19.85 52.6,19.45 U2.5
"OSC OUT": C21.2 U2.6 XTAL2.3 | length 4.3
  Top Layer w0.254: XTAL2.3 51.9,19.45 52.4,18.95 U2.6
RESET: C22.2 P3.3 R14.2 U2.7 | length 29.3
  Top Layer w0.254: C22.2 48.41,17.75 R14.2 49.975,17.75 50.675,18.45 U2.7 60.075,18.45 60.746,19.121 60.746,21.863 61.131,22.248 61.131,25.881 65.5,30.25 65.5,33.46 P3.3
SWCLK: P3.2 U2.37 | length 11.5
  Top Layer w0.254: U2.37 60.677,28.927 63,31.25 63,33.42 P3.2
SWDIO: P3.4 U2.34 | length 16.7
  Top Layer w0.254: U2.34 61.564,20.45 61.441,20.573 61.421,20.573 61.2,20.794 61.2,21.65 62.25,22.7 62.25,24.221 68,29.971 P3.4
USB_N: D2.4 J1.2 | length 2.9
  Top Layer w0.381: J1.2 4.315,18.335 4.917,18.335 5.963,18.335 6.148,18.15 6.4,18.15 D2.4
USB_P: D2.6 J1.3 | length 3.5
  Top Layer w0.381: J1.3 5.339,17.7 6.26,16.78 6.43,16.609 6.641,16.398 7.002,16.398 D2.6
USBD_N: D2.3 U3.2 | length 45
  Top Layer w0.381: D2.3 13.9,18.15 18.9,18.15 19.45,18.15 20.031,17.569 23.016,14.584 23.016,14.582 23.2,14.398 23.2,11.3 23.7,10.8 42.102,10.8 43.487,12.185 44.787,12.185 46.085,12.185 46.1,12.2 47.1,12.2 47.483,11.817 47.483,11.383 47.15,11.05 U3.2@46.691,11.05
USBD_P: D2.1 U3.1 | length 44.9
  Top Layer w0.381: D2.1 16.113,16.25 16.303,16.25 16.303,17.006 17.192,17.006 17.192,16.185 18.081,16.185 18.081,17.006 18.97,17.006 18.97,16.25 19.485,16.25 20.45,16.25 22.565,14.135 22.565,11.037 23.437,10.165 42.365,10.165 43.75,11.55 U3.1
VDD_PA: C14.1 C15.1 L3.2 U1.11 | length 4.3
  Top Layer w0.535: 71.5,16.5 71.85,16.15 L3.2 73.372,16.152 74.495,16.152 75.618,16.152 C15.1
pads on no net: D1.2 D3.2 D4.2 D5.2 J1.4 J1.6 J1.7 J1.8 J1.9 J1.10 J1.11 S1.2 S1.3 U2.3 U2.4 U2.17 U2.18 U2.19 U2.20 U2.21 U2.22 U2.31 U2.32 U2.33 U2.38 U2.39 U2.40 U2.41 U2.45 U2.46 VR2.2 VR2.7 XTAL2.GND

## Polygon pours and split planes (outlines as drawn)
GND on Top Layer "GND_L01_P037" (solid, pour order 37): 0,0 82.5,0 82.5,35 0,35
GND on Top Layer "Top Layer-GND" (solid, pour order 31): 315 vertices, not listed, extent 69.685,12.568 83.183,23.089
GND on Top Layer "GND_L01_P020" (solid, pour order 20): 70.4,21.85 70.5,21.75 72.3,21.75 72.6,21.45 73,21.45 73.2,21.65 73.2,22.85 73,23.05 70.5,23.05 70.4,22.95
5V on Top Layer "5V_L01_P001" (solid, pour order 1): 28.55,29.05 30.55,29.05 32.25,29.05 32.25,27.5 31.8,27.05 31.8,25.55 31.8,18.875 31.675,18.75 28.275,18.75 28.15,18.875 28.15,28.65
NetD3_1 on Top Layer "NETD3_1_L01_P005" (solid, pour order 5): 34.35,18.877 34.477,18.75 37.475,18.75 37.575,18.877 37.575,25.025 37.475,25.15 36.15,25.15 36.05,25.25 36.05,26.35 36.15,26.45 37.25,26.45 37.35,26.55 37.35,28.65 37.25,28.75 33.575,28.75 33.55,28.725 33.55,27.95 33.65,27.85 34.25,27.85 34.35,27.75
3.3V on Top Layer "3.3V" (solid, pour order 10): 38.25,26.05 38.35,25.95 39.75,25.95 41.15,25.95 41.25,26.05 41.25,32.05 41.25,32.25 41.25,32.35 41.25,33.25 41,33.5 38.1,33.5 37.85,33.25 37.85,29.05 37.95,28.95 38.15,28.95 38.25,28.85
5V on Top Layer "5V_L01_P013" (solid, pour order 13): 13.175,23.95 13.175,22.55 13.475,22.25 18.075,22.25 18.275,22.45 18.275,23.35 18.275,24.45 18.075,24.65 16.875,24.65 16.775,24.65 13.975,24.65 13.875,24.75 13.875,25.45 13.775,25.55 13.075,25.55 12.975,25.45 12.975,24.15
5V on Top Layer "5V_L01_P016" (solid, pour order 16): 18.275,23.55 19.675,25.05 26.175,25.05 26.275,24.95 28.275,24.95 28.275,27.15 19.575,27.15 17.075,24.65 18.175,23.55
3.3V on Top Layer "3.3V_L01_P017" (solid, pour order 17): 52.7,24.75 52.9,24.55 55.7,24.55 55.9,24.75 55.9,25.65 55.667,26 52.933,26 52.7,25.65
3.3V on Top Layer "3.3V_L01_P018" (solid, pour order 18): 55.3,24.55 55.3,24.15 55.3,21.95 54.7,21.35 52.7,21.35 52.7,21.55 52.9,21.75 52.9,24.55
GND on Top Layer "GND_L01_P021" (solid, pour order 21): 69.25,21.75 69.325,21.8 69.325,22.7 69.25,22.75 65.8,22.75 65.7,22.65 65.7,21.25 65.6,21.15 64,21.15 63.9,21.05 63.9,20.25 64,20.15 66.6,20.15 67.3,20.85 67.3,21.65 67.4,21.75
3.3V on Top Layer "3.3V_L01_P027" (solid, pour order 27): 65.2,21.85 65.2,22.625 65.075,22.75 62.8,22.75 62.675,22.625 62.675,21.575 62.975,21.312 63.587,21.312 63.95,21.675 65.025,21.675
no net on Top Layer "NONET_L01_P000" (solid, pour order 0): 30.55,28.8 30.8,29.05
no net on Top Layer "NONET_L01_P007" (solid, pour order 7): 32.25,26.95 32.65,27.35
3.3V on Top Layer "3.3V_L01_P019" (solid, pour order 19): 70.1,21.225 70.15,20.95 70.05,20.75 69.825,20.725 69.675,20.85 69.3,20.85 69.3,21.45 69.4,21.55 69.575,21.55 69.6,21.575 69.6,23.05 69.8,23.05 69.9,23.15 70.1,23.15
GND on Bottom Layer "GND_L02_P026" (solid, pour order 26): 0,0 82.5,0 82.5,35 0,35
3.3V on Bottom Layer "3.3V_L02_P030" (solid, pour order 30): 62.7,22.6 62.9,22.8 63.8,22.8 64,22.6 64,22.2 63.8,22 62.9,22 62.7,22.2
3.3V on Bottom Layer "3.3V_L02_P028" (solid, pour order 28): 53,23.8 54.3,23.8 54.4,23.7 54.4,22.5 54.3,22.4 53,22.4 52.9,22.5 52.9,23.7

## Other copper
Top Layer:
  pour cut-out: 18.062,34.039 14.79,34.039 14.776,34.025 14.781,33.904 17.089,33.904 17.089,32.323 17.515,31.896 17.599,31.98 17.351,32.449 17.351,32.914
  pour cut-out: 3.346,19.191 2.751,19.191 2.751,16.364 2.704,16.317 2.821,16.2 3.4,16.2
  pour cut-out: 32,24 34.111,24 34.111,18.511 37.834,18.511 37.834,24 38,24 38,15.75 27.75,15.75 27.75,24 27.911,24 27.911,18.511 32.039,18.511 32.039,21.5 32.039,21.9
  pour cut-out: 59.704,3.579 59.704,4.021 56.721,4.021 56.6,3.9 56.6,2.5 56.775,2.5 56.796,2.521 56.796,3.579
  pour cut-out: 82.5,24.775 81.525,24.775 81.525,23.214 82.5,23.214
  pour cut-out: 45.446,20.756 45.446,20.344 46.936,20.344 46.996,20.404 48.231,20.404 48.231,20.473 48.279,20.521 48.105,20.696 47.014,20.696 46.954,20.756
  pour cut-out: 13.846,29.484 13.846,29.479 14.2,29.125 14.722,29.646 14.871,29.646 14.871,31.004 15.979,31.004 15.979,29.765 16.098,29.646 16.771,29.646 16.771,30.96 16.815,31.004 16.131,31.688 13.864,31.688 13.864,31.017 13.951,30.93
  pour cut-out: 6.971,30.171 7.696,30.171 8.004,29.863 8.245,29.863 8.379,29.729 6.971,29.729
  pour cut-out: 17.996,25.938 19.448,27.389 19.476,27.389 19.476,27.926 17.879,26.329 17.879,26.327
  pour cut-out: 16.929,28.854 16.889,28.814 16.889,26.937 17.035,26.937 19.271,29.173 19.271,30.454 18.879,30.454 18.863,30.438 18.863,29.489 18.35,28.975
  pour cut-out: 5.712,29.559 6.072,29.919 6.072,34.027 6.902,34.856 6.902,35 5.637,35
  pour cut-out: 291 vertices and 0 holes, not listed, extent 70.187,13.078 82.667,22.579
  pour cut-out: 60.075,18.062 60.759,18.062 60.759,17.531
  pour cut-out: 54.525,15.925 54.568,15.431 55.019,15.431
  pour cut-out: 53,14.8 54.6,14.8 54.6,15.3 53.2,15.3
  pour cut-out: 50.946,12.071 52.861,12.071 52.861,13.987 54.765,13.987 54.765,13.211 55.288,13.211 55.288,13.1 52.186,13.1 52.186,11.954 50.994,11.954
  region net VDD_PA: 71.725,16.65 71.35,16.275 70.8,16.825 70.925,16.95 71.407,16.95
  region net ANT1: 71.3,17.35 71.525,17.35 72,16.875 72.025,16.875 72.025,17.4 71.85,17.55 71.3,17.55
  region net ANT2: 71.995,18.415 71.645,18.065 71.32,18.065 71.32,17.865 71.995,17.865
Bottom Layer:
  pour cut-out: 27.75,24 27.75,15.75 38,15.75 38,24
Multi-Layer:
  pour cut-out: 82.5,0 77.25,0 cw(c77.25,0.5) 76.75,0.5 76.75,5.25 cw(c77.25,5.25) 77.25,5.75 82,5.75 cw(c82,5.25) 82.5,5.25
  pour cut-out: 82.5,35 82.5,29.75 cw(c82,29.75) 82,29.25 77.25,29.25 cw(c77.25,29.75) 76.75,29.75 76.75,34.5 cw(c77.25,34.5) 77.25,35
  pour cut-out: 0,35 5.25,35 cw(c5.25,34.5) 5.75,34.5 5.75,29.75 cw(c5.25,29.75) 5.25,29.25 0.5,29.25 cw(c0.5,29.75) 0,29.75
  pour cut-out: 0,0 0,5.25 cw(c0.5,5.25) 0.5,5.75 5.25,5.75 cw(c5.25,5.25) 5.75,5.25 5.75,0.5 cw(c5.25,0.5) 5.25,0
  pour cut-out: 82.425,9.575 82.425,10.925 82.2,10.7 82.2,9.8
  pour cut-out: 82.42,26 82.42,29.283 82.5,29.363 82.5,26
  pour cut-out: 82.5,5.637 82.5,9.1 82.3,8.9 82.3,5.554
  pour cut-out: 83.306,26 82.42,26 82.42,8.7 83.197,8.7

## Silkscreen, mask and mechanical layers (free items; w line width, h text height)
Top Overlay:
  text "3.3V" at 59.025,32.25 h2 r270
  text "CLK" at 61.6,32.25 h2 r270
  text "RST" at 64.15,32.25 h2 r270
  text "DIO" at 66.7,32.25 h2 r270
  text "GND" at 71.9,27.25 h2 r90
  text "PWR" at 0.7,24.416 h1
  text "TXRX" at 0.65,9.85 h1
  text "A" at 66.965,3.55 h1.2
  text "B" at 70.1,3.525 h1.2
Bottom Overlay:
  drawing of 9 lines, arcs and shapes, not listed
  text "I2C" at 61.45,6.55 h4
  text "3.3V" at 56.8,6.1 h1.5 r90
  text "SDA" at 58.5,6.1 h1.5 r90
  text "SCL" at 60.2,6.1 h1.5 r90
  text "GND" at 61.9,6.1 h1.5 r90
  text "RadioBell" at 41.95,3.9 h3.2
  text "@TM - De Nayer" at 28.8,2.998 h1.5
  text "Louis Van Lommel" at 42.1,0.8 h3.2
Mechanical 1:
  lines w0.254: 83.67,9.75 ccw(c83.67,8.48) 82.4,8.48 82.4,2.9 82.4,1.27 cw(c81.13,1.27) 81.13,0 1.27,0 cw(c1.27,1.27) 0,1.27 0,33.73 cw(c1.27,33.73) 1.27,35 81.23,35 cw(c81.23,33.73) 82.5,33.73 82.5,27 82.5,26.219 ccw(c83.77,26.219) 83.77,24.949 87.412,24.949 cw(c87.412,24.642) 87.719,24.642 87.719,10.039 cw(c87.43,10.039) 87.43,9.75 83.77,9.75